# Altium PCB ProgrammatorBoard.PcbDoc
Units mm, origin at the board's own origin, x right, y up, seen from the top; angles counter-clockwise.
Board outline 33.8 x 73.3 mm, 2 copper layers (Top Signal Layer, Bottom Signal Layer), stack 1.571 mm thick; 8 components, 16 nets, 50 pads, 8 vias.
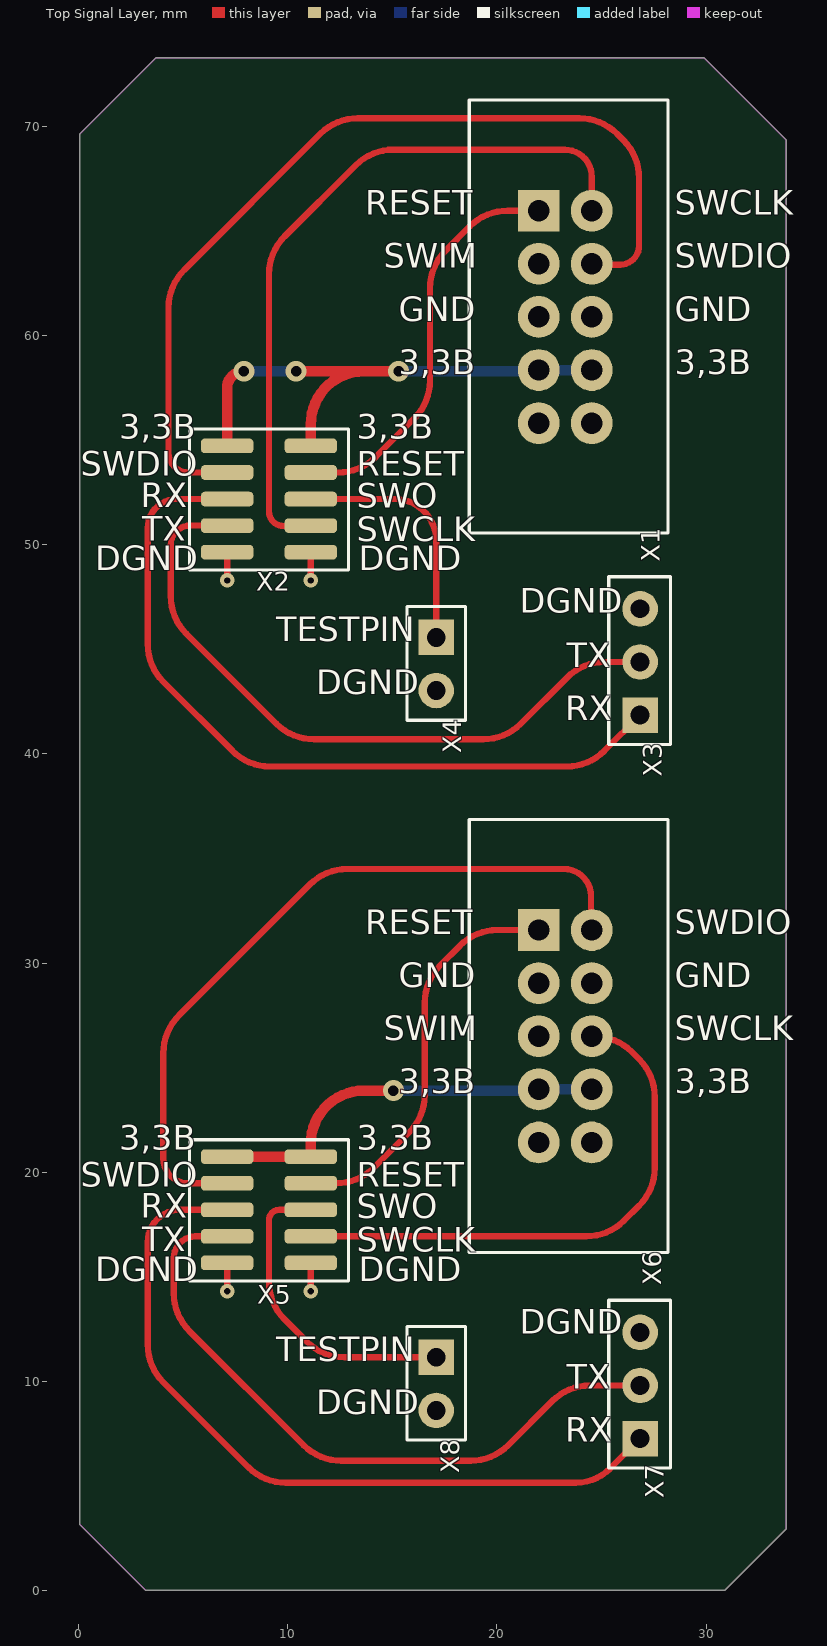
[diagram p0: Top Signal Layer view]
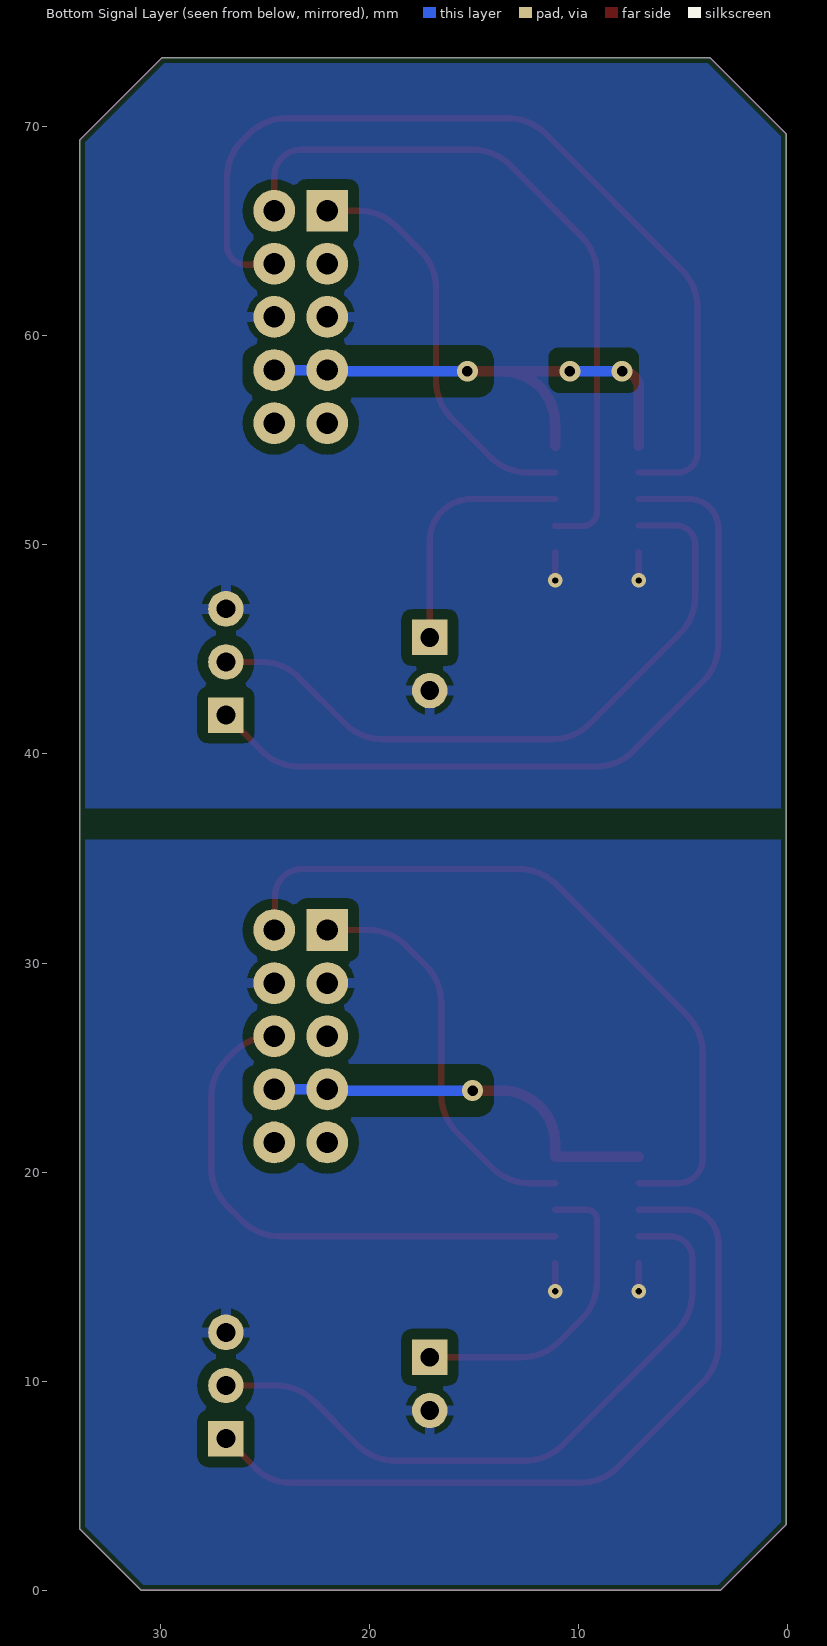
[diagram p1: Bottom Signal Layer view, seen from below]
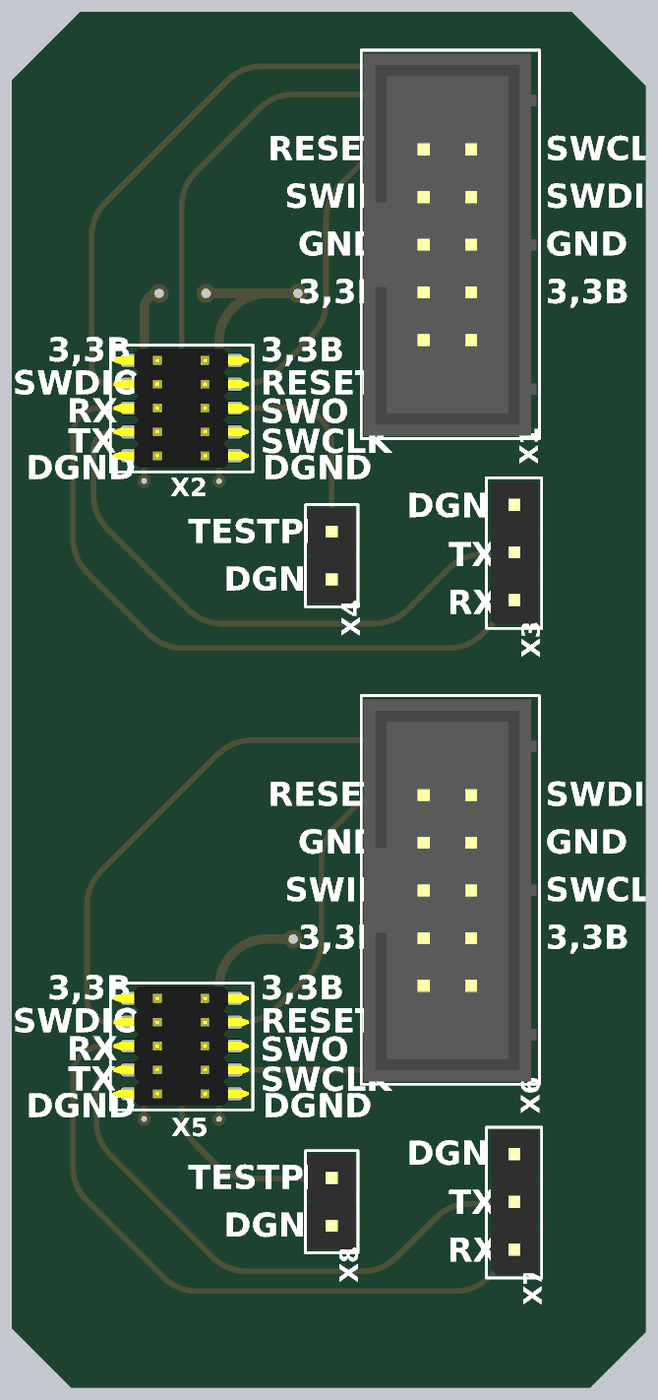
[diagram p2: 3D render of the assembled board from above, using the file's embedded part models]

## Layer stack, top to bottom
Top Solder: solder mask 0.0102, Solder Resist, Dk 3.5
Top Signal Layer: signal copper 0.0356
Dielectric 1: core 1.5, FR-4, Dk 4.2
Bottom Signal Layer: signal copper 0.0356
Bottom Solder: solder mask 0.0102, Solder Resist, Dk 3.5

## Board outline
0.045,3.155 3.2,0 30.9,0 33.845,2.945 33.845,69.355 29.9,73.3 3.7,73.3 0.045,69.645

## Design rules (kind name [scope] priority, off if disabled: settings)
Clearance Clearance_Edge_Mid [(OnLayer('Signal_Layer_2') OR OnLayer('Top_Layer') Or OnLayer('Signal_Layer_1') Or OnLayer('Bottom_Layer')) vs (OnLayer('Keep-Out Layer'))] p1: gap=0.5 ignorepadtopadclearanceinfootprint=FALSE except(0: Arc-Hole Track-Hole SMDPad-Hole THPad-Hole Via-Hole Fill-Hole Poly-Hole Region-Hole Text-Hole)
Clearance Clearance_Poly_Mid [((InPoly) AND (OnLayer('Power Layer') OR OnLayer('Ground Layer') Or OnLayer('Termo Top Layer') Or OnLayer('Termo Bottom Layer')))] p2: gap=0.25 ignorepadtopadclearanceinfootprint=FALSE except(0: Arc-Hole Track-Hole SMDPad-Hole THPad-Hole Via-Hole Fill-Hole Poly-Hole Region-Hole Text-Hole)
Clearance Clearance_Mid [(OnLayer('Signal_Layer_2') OR OnLayer('Top_Layer') Or OnLayer('Signal_Layer_1') Or OnLayer('Bottom_Layer'))] p3: gap=0.15 ignorepadtopadclearanceinfootprint=FALSE except(0: Arc-Hole Track-Hole SMDPad-Hole THPad-Hole Via-Hole Fill-Hole Poly-Hole Region-Hole Text-Hole)
Clearance Clearance_Edge [All vs (OnLayer('Keep-Out Layer'))] p4: gap=0.25 ignorepadtopadclearanceinfootprint=FALSE
Clearance Clearance_Poly [((InPoly) AND (OnLayer('Top_Layer') OR OnLayer('Bottom_Layer')))] p5: gap=0.2 ignorepadtopadclearanceinfootprint=FALSE except(0: Arc-Hole Track-Hole SMDPad-Hole THPad-Hole Via-Hole Fill-Hole Poly-Hole Region-Hole Text-Hole)
Clearance Clearance_PGND [InNet('PGND')] p6: gap=0.3 ignorepadtopadclearanceinfootprint=FALSE
Clearance [All] p7: gap=0.15 ignorepadtopadclearanceinfootprint=FALSE except(0: Arc-Hole Track-Hole SMDPad-Hole THPad-Hole Via-Hole Fill-Hole Poly-Hole Region-Hole Text-Hole; 0.5: Arc-THPad Track-THPad THPad-Fill THPad-Poly THPad-Region)
ComponentClearance ComponentClearance_0.2 [All] p1: gap=0.2 collisioncheckmode=3 verticalgap=0.2 showdistances=FALSE
ComponentOrientations ComponentOrientations_All [All] p1: allowedrotations=32
DiffPairsRouting [All] p1: maxlimit=0.5 minlimit=0.2 mostfreqgap=0.2 toplayer_minwidth=0.2 toplayer_maxwidth=0.5 toplayer_prefwidth=0.2 bottomlayer_minwidth=0.2 bottomlayer_maxwidth=0.5 bottomlayer_prefwidth=0.2 maxuncoupledlength=12.7
FabricationTestPointUsage [All] p1: valid=0 allowmultiple=TRUE
FabricationTestpoint [All] p1: side=3 testpointundercomponent=TRUE minsize=1 maxsize=2.5 preferedsize=1.5 minholesize=0 maxholesize=1 preferedholesize=0.7 testpointgrid=0.025 allowsidetop=TRUE allowsidebottom=TRUE usegrid=TRUE gridtolerance=0
Height [All] p1: minheight=0 maxheight=30 prefheight=0
HoleSize [All] p1: absolutevalues=TRUE maxlimit=10 minlimit=0.2 maxpercent=80.000 minpercent=20.000
HoleToHoleClearance HOLE_TO_HOLE_0.2 [All] p1: gap=0.2 allowstackedmicrovias=TRUE
MinimumSolderMaskSliver MIN_MASK_0.15 [All] p1: minsoldermaskwidth=0.05
NetAntennae NO_ANT [All] p1: netantennaetolerance=0
PlaneClearance [All] p1: clearance=0.5
PlaneConnect [All] p1: planeconnectstyle=Relief reliefexpansion=0.5 reliefentries=4 reliefconductorwidth=0.2 reliefairgap=0.2
PolygonConnect PolygonConnect_Via [IsVia] p1: connectstyle=Direct reliefconductorwidth=0.2 reliefentries=4 polygonreliefangle="90 Angle" airgapwidth=0.3
PolygonConnect PolygonConnect_IND [HasFootprint('SDR1006')] p2: connectstyle=Relief reliefconductorwidth=2 reliefentries=4 polygonreliefangle="90 Angle" airgapwidth=0.2
PolygonConnect PolygonConnect_IND_EX [HasFootprint('SDR0604')] p3: connectstyle=Relief reliefconductorwidth=1.8 reliefentries=4 polygonreliefangle="90 Angle" airgapwidth=0.2
PolygonConnect PolygonConnect_LED [InNet('NetL3_2')] p4: connectstyle=Relief reliefconductorwidth=0.8 reliefentries=4 polygonreliefangle="90 Angle" airgapwidth=0.2
PolygonConnect PolygonConnect_LED_R [InNet('ISP')] p5: connectstyle=Relief reliefconductorwidth=0.8 reliefentries=4 polygonreliefangle="90 Angle" airgapwidth=0.2
PolygonConnect PolygonConnect_CAN [InNet('NetC17_2')] p6: connectstyle=Relief reliefconductorwidth=0.8 reliefentries=4 polygonreliefangle="90 Angle" airgapwidth=0.2
PolygonConnect PolygonConnect_CAN_GND [InNet('GND_CAN')] p7: connectstyle=Relief reliefconductorwidth=0.8 reliefentries=4 polygonreliefangle="90 Angle" airgapwidth=0.2
PolygonConnect PolygonConnect_MOLEX_DRIVER [HasFootprint('MOLEX_532580829')] p8: connectstyle=Relief reliefconductorwidth=1.5 reliefentries=4 polygonreliefangle="90 Angle" airgapwidth=0.2
PolygonConnect PolygonConnect_MOLEX_PWR [HasFootprint('MOLEX_1720650010')] p9: connectstyle=Relief reliefconductorwidth=2 reliefentries=4 polygonreliefangle="90 Angle" airgapwidth=0.2
PolygonConnect PolygonConnect_MOLEX_DRIVER_VL [HasFootprint('MOLEX_532580929')] p10: connectstyle=Relief reliefconductorwidth=1.5 reliefentries=4 polygonreliefangle="90 Angle" airgapwidth=0.2
PolygonConnect PolygonConnect_SHUNT [HasFootprint('R2010')] p11: connectstyle=Relief reliefconductorwidth=1 reliefentries=4 polygonreliefangle="90 Angle" airgapwidth=0.2
PolygonConnect PolygonConnect_SHUNT_1 [InNet('NetDD3_15')] p12: connectstyle=Relief reliefconductorwidth=0.4 reliefentries=4 polygonreliefangle="90 Angle" airgapwidth=0.2
PolygonConnect PolygonConnect_48B [InNet('+48B')] p13: connectstyle=Relief reliefconductorwidth=0.8 reliefentries=4 polygonreliefangle="90 Angle" airgapwidth=0.2
PolygonConnect PolygonConnect_24B [InNet('+24B')] p14: connectstyle=Relief reliefconductorwidth=0.8 reliefentries=4 polygonreliefangle="90 Angle" airgapwidth=0.2
PolygonConnect PolygonConnect_CAP [InNet('NetC1_1')] p15: connectstyle=Relief reliefconductorwidth=1.2 reliefentries=4 polygonreliefangle="90 Angle" airgapwidth=0.2
PolygonConnect PolygonConnect_PGND [InNet('PGND')] p16: connectstyle=Relief reliefconductorwidth=0.8 reliefentries=4 polygonreliefangle="90 Angle" airgapwidth=0.2
PolygonConnect PolygonConnect_SHIELD [InNet('EGND')] p17: connectstyle=Direct reliefconductorwidth=0.8 reliefentries=4 polygonreliefangle="90 Angle" airgapwidth=0.2
PolygonConnect PolygonConnect_Frame [InNet ('Signal_Layer_1')] p18: connectstyle=Direct reliefconductorwidth=0.2 reliefentries=4 polygonreliefangle="90 Angle" airgapwidth=0.2
PolygonConnect [All] p19: connectstyle=Relief reliefconductorwidth=0.5 reliefentries=4 polygonreliefangle="90 Angle" airgapwidth=0.3
RoutingCorners RoutingCornersArc [All] p1: cornerstyle=45-Degree minsetback=2.5 maxsetback=2.5
RoutingTopology All_Short [All] p1: topology=Shortest
RoutingVias [All] p1: holewidth=0.2 width=0.4 viastyle="Through Hole" minholewidth=0.2 minwidth=0.4 maxholewidth=3 maxwidth=4
SMDEntry SMDConnect [All] p1 off: side=TRUE corner=TRUE anyangle=FALSE
ShortCircuit NO_KZ [All] p1: allowed=FALSE
SilkToSilkClearance SILK_TO_SILK_0.15 [All] p1: silktosilkclearance=0
SilkToSolderMaskClearance SilkToSolderMaskClearance_0.1 [IsPad] p1: minsilkscreentomaskgap=0 clearancetoexposedcopper=TRUE
SolderMaskExpansion MASK_0.075 [All] p1: expansion=0.05 useseparateexpansions=TRUE expansionbottom=0.05
UnpouredPolygon NoUnpoured [All] p1:
Width [All] p1: maxlimit=4 minlimit=0.1 preferedwidth=0.3 minimp=50.000000 maximp=50.000000 favimp=50.000000
13 further rules are at their usual default settings.

## Components (designator, comment, footprint, x,y, rotation, side; value= is the part's Value field where it differs from the comment)
X1 "Header_10_plg" IDC-10MS 23.275,60.865 r0 top
X2 "Header_10_sct" PAVX15-2X05-H 9.1,52.19 r270 top
X3 "Header_3_plg" PLS-3 26.85,44.4 r180 top
X4 "" PLS-2 17.1,44.225 r0 top
X5 "Header_10_sct" PAVX15-2X05-H 9.1,18.2 r270 top
X6 "Header_10_plg" IDC-10MS 23.275,26.465 r0 top
X7 "Header_3_plg" PLS-3 26.85,9.8 r180 top
X8 "" PLS-2 17.1,9.8 r0 top

## Footprints (in the part's own frame and the unit in brackets; to place one, negate y for a bottom-side part, rotate by r counter-clockwise, add the part's x,y. Pads: shape width x height; smd on the part's side, far side on the other; paste and mask are expansions set on the pad)
IDC-10MS [mm]
  rect 2x2 hole 1.02: 1(-1.275,5.115)
  round 2 hole 1.02: 2(1.265,5.115) 3(-1.275,2.575) 4(1.265,2.575) 5(-1.275,0.035) 6(1.265,0.035) 7(-1.275,-2.505) 8(1.265,-2.505) 9(-1.275,-5.045) 10(1.265,-5.045)
  silkscreen extent -4.6,-10.3 4.9,10.4, body extent -4.45,-10.16 4.75,10.2, height 9.19
PAVX15-2X05-H [mm]
  rrect50% 0.7x2.5 smd: 1(-2.54,-2) 2(-2.54,2) 3(-1.27,-2) 4(-1.27,2) 5(0,-2) 6(0,2) 7(1.27,-2) 8(1.27,2) 9(2.54,-2) 10(2.54,2)
  silkscreen extent -3.35,-3.8 3.4,3.8, body extent -3.17,-3.63 3.17,3.57, height 7.73
PLS-2 [mm]
  rect 1.7x1.7 hole 0.9: 1(0,1.345)
  round 1.7 hole 0.9: 2(0,-1.195)
  silkscreen extent -1.4,-2.61 1.4,2.83, body extent -1.26,-2.44 1.28,2.64, height 8.54
PLS-3 [mm] "Разъем для программатора ISP"
  rect 1.7x1.7 hole 0.9: 1(0,2.54)
  round 1.7 hole 0.9: 2(0,0) 3(0,-2.54)
  silkscreen extent -1.45,-4.07 1.5,3.95, body extent -1.26,-3.91 1.28,3.71, height 8.54

## Part data
X1 X6: library part connect200, "Разъем - 10 конт. вилка", Manufacture="Connfly electronic", Part Name="BH-10 вилка", Part Number=DS1013-10SSiB1-B-0, Contact_1=RESET, Contact_7=+3,3B, Contact_8=+3,3B, Contact_9=+5B, Contact_10=+5B, Etch=2.54mm, id=connect200
  X1: Contact_2=SWCLK, Contact_3=SWIM, Contact_4=SWDIO, Contact_5=GND, Contact_6=GND
  X6: Contact_2=SWDIO, Contact_3=GND, Contact_4=GND, Contact_5=SWIM, Contact_6=SWCLK
X2 X5: library part connect107, "Разъем - 10 конт. розетка", Manufacture="Auk Contractors", Part Name="Штыри двухрядные 2x5", Part Number=PAVX15-2X05-H, Contact_1=+3,3B, Contact_2=+3,3B, Contact_3=SWDIO, Contact_4=RESET, Contact_5=RX, Contact_6=SWO, Contact_7=TX, Contact_8=SWCLK, Contact_9=DGND, Contact_10=DGND, Etch=1.27mm, id=connect107
X3 X7: library part connect33, "Разъем - 3 конт. вилка", Manufacture="Ningbo connfly electronic", Part Name=PLS-3, Part Number=DS1021-1*3SF112-B, Contact_1=RX, Contact_2=TX, Contact_3=DGND, Etch=2,54mm, id=connect33
X4 X8: library part connect159, "Разъем - 2 конт. вилка", Part Name=PLS-2, Contact_1=TESTPIN, Contact_2=DGND, Etch=2,54mm, id=connect159

## Via types
v1: diameter 1, hole 0.5, Top Signal Layer to Bottom Signal Layer, tented both sides, 4 vias
v2: diameter 0.7, hole 0.3, Top Signal Layer to Bottom Signal Layer, tented both sides, 4 vias

## Nets (pads, with @x,y where several pads share a name; then routed paths per layer and width w, separated by ;. In a path a pad name is that pad's centre, name@x,y a point inside that pad or via, vN(x,y) a via of type N, cw(c..) or ccw(c..) an arc to the next point about the centre after c; other vN are vias at no path point)
+3,3B_1: X1.7 X1.8 X2.1 X2.2 | length 25.9
  Top Signal Layer w0.5: X2.1 7.1,57.5 cw(c7.9,57.5) v1(7.9,58.3) ; v1(10.4,58.3) 13.64,58.3 ; X2.2 11.1,55.76 cw(c13.64,55.76) 13.64,58.3 ; v1(15.3,58.3) 13.64,58.3
  Bottom Signal Layer w0.5: v1(7.9,58.3) v1(10.4,58.3) ; v1@15.05,58.3 v1(15.3,58.3) X1.7@21.94,58.3 ; X1.7 X1.8
+3,3B_2: X5.1 X5.2 X6.7 X6.8 | length 19.5
  Top Signal Layer w0.5: X5.1 X5.2 11.1,21.36 cw(c13.64,21.36) 13.64,23.9 v1(15.05,23.9)
  Bottom Signal Layer w0.5: v1(15.05,23.9) 21.94,23.9 ccw(c21.94,23.96) X6.7 X6.8
DGND_1: X1.5 X1.6 X2.9 X2.10 X3.3 X4.2 | length 2.7
  Top Signal Layer w0.3: v2(7.1,48.3) X2.9 ; v2(11.1,48.3) X2.10
DGND_2: X5.9 X5.10 X6.3 X6.4 X7.3 X8.2 | length 2.7
  Top Signal Layer w0.3: v2(7.1,14.31) X5.9 ; v2(11.1,14.31) X5.10
NetX1_1: X1.1 X2.4 | length 19.5
  Top Signal Layer w0.3: X2.4 12.408,53.46 ccw(c12.408,56) 14.204,54.204 16.056,56.056 ccw(c14.26,57.852) 16.8,57.852 16.8,62.273 cw(c19.34,62.273) 17.544,64.069 18.711,65.236 cw(c20.507,63.44) 20.507,65.98 X1.1
NetX1_2: X1.2 X2.8 | length 34.4
  Top Signal Layer w0.3: X2.8 cw(c11.08,50.92) 11.08,50.9 9.8,50.9 cw(c9.8,51.6) 9.1,51.6 9.1,62.948 cw(c11.64,62.948) 9.844,64.744 13.256,68.156 cw(c15.052,66.36) 15.052,68.9 23.24,68.9 cw(c23.24,67.6) 24.54,67.6 X1.2
NetX1_4: X1.4 X2.3 | length 44.6
  Top Signal Layer w0.3: X2.3 5.24,53.46 cw(c5.24,54.4) 4.3,54.4 4.3,61.348 cw(c6.84,61.348) 5.044,63.144 11.556,69.656 cw(c13.352,67.86) 13.352,70.4 23.948,70.4 cw(c23.948,67.86) 25.744,69.656 26.056,69.344 cw(c24.26,67.548) 26.8,67.548 26.8,64.3 cw(c25.9,64.3) 25.9,63.4 24.58,63.4 cw(c24.58,63.44) X1.4
NetX2_5: X2.5 X3.1 | length 37.4
  Top Signal Layer w0.3: X2.5 4.69,52.19 ccw(c4.69,50.8) 3.3,50.8 3.3,45.252 ccw(c5.84,45.252) 4.044,43.456 7.356,40.144 ccw(c9.152,41.94) 9.152,39.4 23.338,39.4 ccw(c23.338,41.94) 25.134,40.144 X3.1
NetX2_6: X2.6 X4.1 | length 11.8
  Top Signal Layer w0.3: X2.6 15.11,52.19 cw(c15.11,50.2) 17.1,50.2 X4.1
NetX2_7: X2.7 X3.2 | length 32.7
  Top Signal Layer w0.3: X2.7 5.32,50.92 ccw(c5.32,50) 4.4,50 4.4,47.552 ccw(c6.94,47.552) 5.144,45.756 9.456,41.444 ccw(c11.252,43.24) 11.252,40.7 19.348,40.7 ccw(c19.348,43.24) 21.144,41.444 23.356,43.656 cw(c25.152,41.86) 25.152,44.4 X3.2
NetX5_3: X5.3 X6.2 | length 35.9
  Top Signal Layer w0.3: X5.3 5.23,19.47 cw(c5.23,20.65) 4.05,20.65 4.05,25.698 cw(c6.59,25.698) 4.794,27.494 11.056,33.756 cw(c12.852,31.96) 12.852,34.5 23.2,34.5 cw(c23.2,33.2) 24.5,33.2 24.5,31.61 24.51,31.61 ccw(c24.54,31.61) X6.2 X6.2@24.54,31.858
NetX5_4: X5.4 X6.1 | length 19.3
  Top Signal Layer w0.3: X5.4 12.318,19.47 ccw(c12.318,22.01) 14.114,20.214 15.806,21.906 ccw(c14.01,23.702) 16.55,23.702 16.55,28.098 cw(c19.09,28.098) 17.294,29.894 18.236,30.836 cw(c20.032,29.04) 20.032,31.58 X6.1
NetX5_5: X5.5 X7.1 | length 37
  Top Signal Layer w0.3: X5.5 4.85,18.2 ccw(c4.85,16.65) 3.3,16.65 3.3,11.752 ccw(c5.84,11.752) 4.044,9.956 8.106,5.894 ccw(c9.902,7.69) 9.902,5.15 23.772,5.15 ccw(c23.772,7.487) 25.425,5.835 X7.1
NetX5_6: X5.6 X8.1 | length 15.1
  Top Signal Layer w0.3: X5.6 9.6,18.2 ccw(c9.6,17.7) 9.1,17.7 9.1,14.758 ccw(c11.64,14.758) 9.844,12.962 10.917,11.889 ccw(c12.713,13.685) 12.713,11.145 X8.1
NetX5_7: X5.7 X7.2 | length 32.1
  Top Signal Layer w0.3: X5.7 5.58,16.93 ccw(c5.58,15.9) 4.55,15.9 4.55,14.202 ccw(c7.09,14.202) 5.294,12.406 10.756,6.944 ccw(c12.552,8.74) 12.552,6.2 18.748,6.2 ccw(c18.748,8.74) 20.544,6.944 22.656,9.056 cw(c24.452,7.26) 24.452,9.8 X7.2
NetX5_8: X5.8 X6.6 | length 26.2
  Top Signal Layer w0.3: X5.8 24.278,16.93 ccw(c24.278,19.47) 26.074,17.674 26.806,18.406 ccw(c25.01,20.202) 27.55,20.202 27.55,23.598 ccw(c25.01,23.598) 26.806,25.394 26.444,25.756 ccw(c24.648,23.96) 24.648,26.5 X6.6
pads on no net: X1.3 X1.9 X1.10 X6.5 X6.9 X6.10

## Polygon pours and split planes (outlines as drawn)
DGND_2 on Bottom Signal Layer "Top Signal Layer-No Net" (solid, remove dead copper, pour order 2): 33.845,2.945 30.9,0 3.2,0 0.045,3.155 0.045,35.9 33.845,35.9
DGND_1 on Bottom Signal Layer "Top Signal Layer-No Net" (solid, remove dead copper, pour order 0): 0.05,69.65 3.7,73.3 29.9,73.3 33.845,69.355 33.845,37.4 0.05,37.4

## Keep-outs
Keep-Out Layer:
  lines w0.01: 0.045,3.155 0.045,60.78 0.045,69.645 3.7,73.3 29.9,73.3 33.845,69.355 33.845,60.78 33.845,2.945 30.9,0 3.2,0 0.045,3.155

## Other copper
Bottom Signal Layer:
  pour cut-out: 7.1,58.936 7.1,57.772 ccw(c7.602,57.772) 7.602,57.27 10.89,57.27 ccw(c10.89,57.78) 11.4,57.78 11.4,58.968 ccw(c10.941,58.968) 10.94,59.428 7.591,59.428 ccw(c7.591,58.936)
  pour cut-out: 14.8,59.55 25.325,59.55 cw(c25.325,58.825) 26.05,58.825 26.05,57.918 cw(c25.182,57.918) 25.183,57.05 14.8,57.05 cw(c14.8,57.8) 14.05,57.8 14.05,58.8 cw(c14.8,58.8)
  pour cut-out: 14.8,25.15 25.325,25.15 cw(c25.325,24.425) 26.05,24.425 26.05,23.518 cw(c25.182,23.518) 25.183,22.65 14.8,22.65 cw(c14.8,23.4) 14.05,23.4 14.05,24.4 cw(c14.8,24.4)

## Silkscreen, mask and mechanical layers (free items; w line width, h text height)
Top Overlay:
  text "RESET" at 13.7,65.4 h2
  text "SWCLK" at 28.5,65.4 h2
  text "SWIM" at 14.596,62.86 h2
  text "SWDIO" at 28.5,62.86 h2
  text "GND" at 15.302,60.32 h2
  text "GND" at 28.5,60.32 h2
  text "3,3B" at 15.302,57.78 h2
  text "3,3B" at 28.5,57.78 h2
  text "3,3B" at 1.946,54.68 h2
  text "3,3B" at 13.302,54.68 h2
  text "SWDIO" at 0.1,52.92 h2
  text "RESET" at 13.302,52.92 h2
  text "RX" at 2.966,51.42 h2
  text "SWO" at 13.302,51.4 h2
  text "TX" at 3.052,49.82 h2
  text "SWCLK" at 13.302,49.8 h2
  text "DGND" at 0.804,48.4 h2
  text "DGND" at 13.404,48.4 h2
  text "DGND" at 21.1,46.38 h2
  text "TESTPIN" at 9.45,45.01 h2
  text "TX" at 23.348,43.76 h2
  text "DGND" at 11.35,42.47 h2
  text "RX" at 23.263,41.22 h2
  text "RESET" at 13.7,31 h2
  text "SWDIO" at 28.5,31 h2
  text "GND" at 15.302,28.46 h2
  text "GND" at 28.5,28.46 h2
  text "SWIM" at 14.596,25.92 h2
  text "SWCLK" at 28.5,25.92 h2
  text "3,3B" at 15.302,23.38 h2
  text "3,3B" at 28.5,23.38 h2
  text "3,3B" at 1.946,20.69 h2
  text "3,3B" at 13.302,20.69 h2
  text "SWDIO" at 0.1,18.93 h2
  text "RESET" at 13.302,18.93 h2
  text "RX" at 2.966,17.43 h2
  text "SWO" at 13.302,17.41 h2
  text "TX" at 3.052,15.83 h2
  text "SWCLK" at 13.302,15.81 h2
  text "DGND" at 0.804,14.41 h2
  text "DGND" at 13.404,14.41 h2
  text "DGND" at 21.1,11.88 h2
  text "TESTPIN" at 9.45,10.585 h2
  text "TX" at 23.348,9.26 h2
  text "DGND" at 11.35,8.045 h2
  text "RX" at 23.263,6.72 h2